# Altium PCB ESC PCB.PcbDoc
Units mil, origin at the board's own origin, x right, y up, seen from the top; angles counter-clockwise.
Board outline 5629.92 x 3964.57 mil, 2 copper layers (Top Layer, Bottom Layer), stack 65.792 mil thick; 99 components, 73 nets, 311 pads, 137 vias.
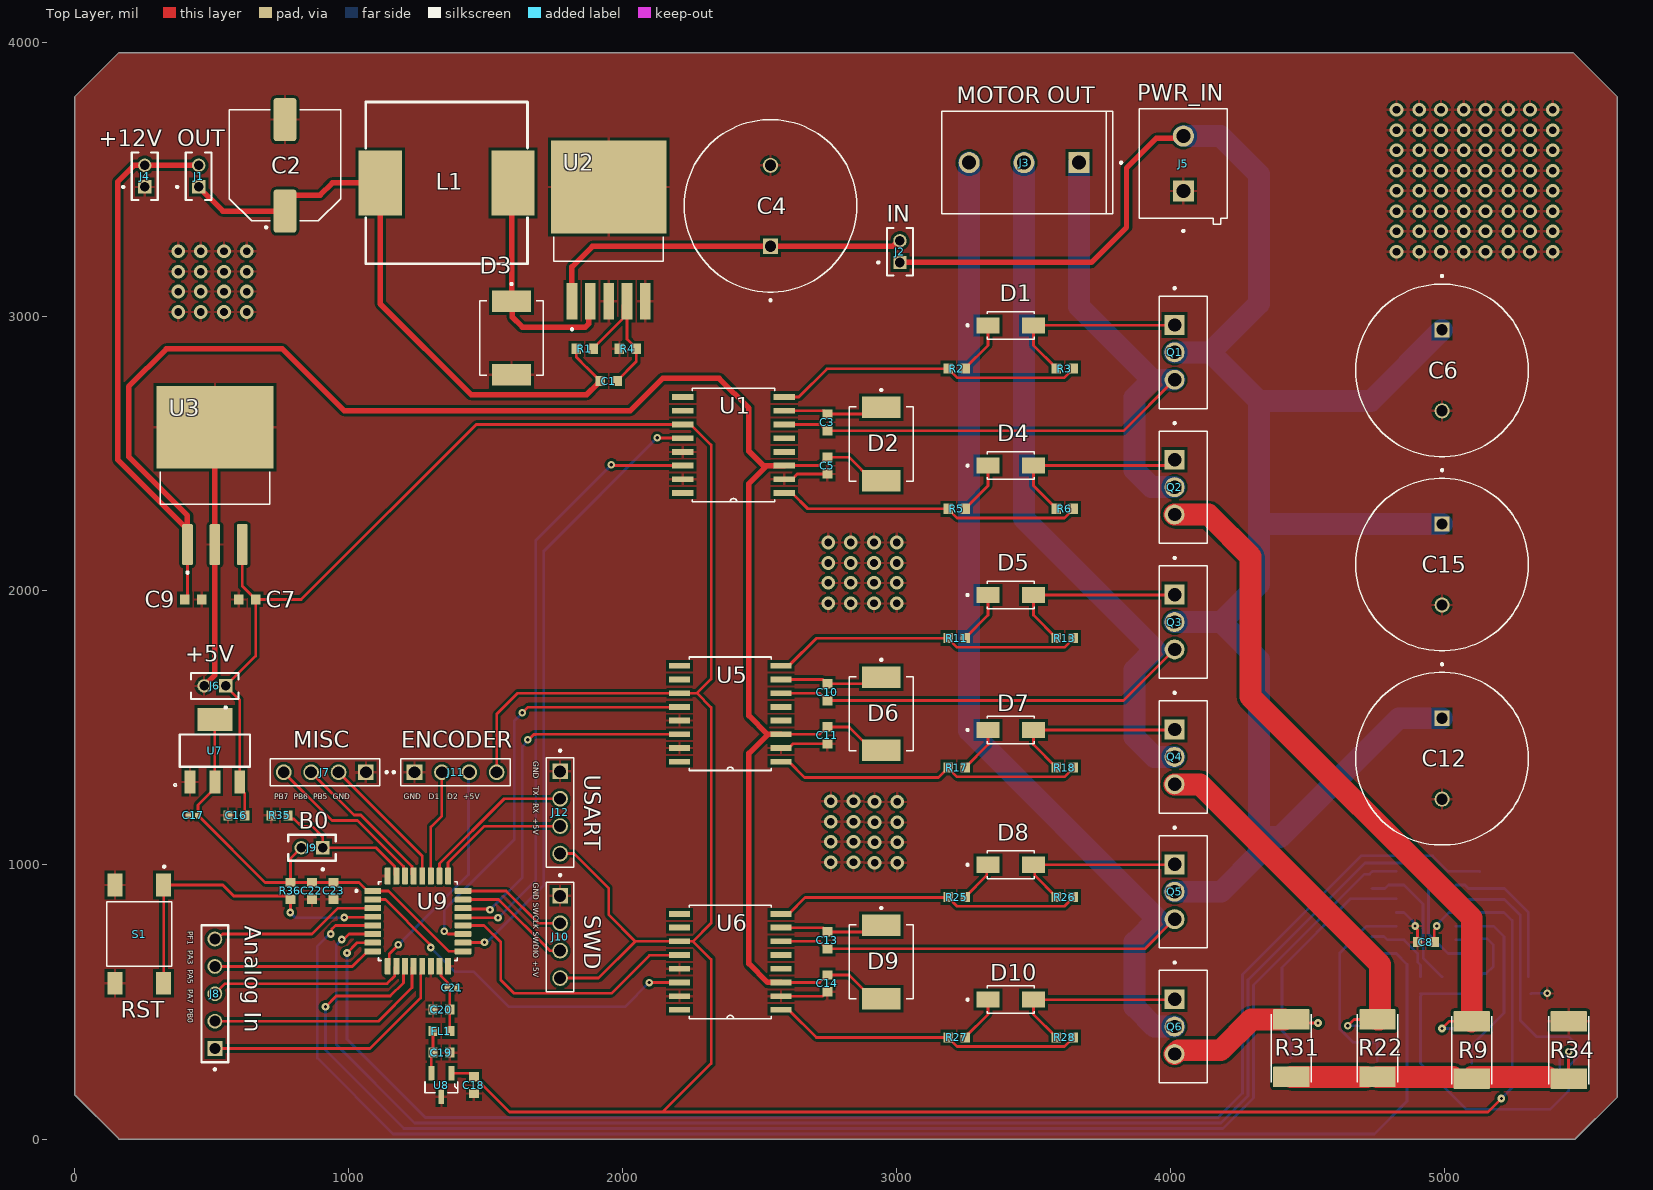
[diagram p0: Top Layer view]
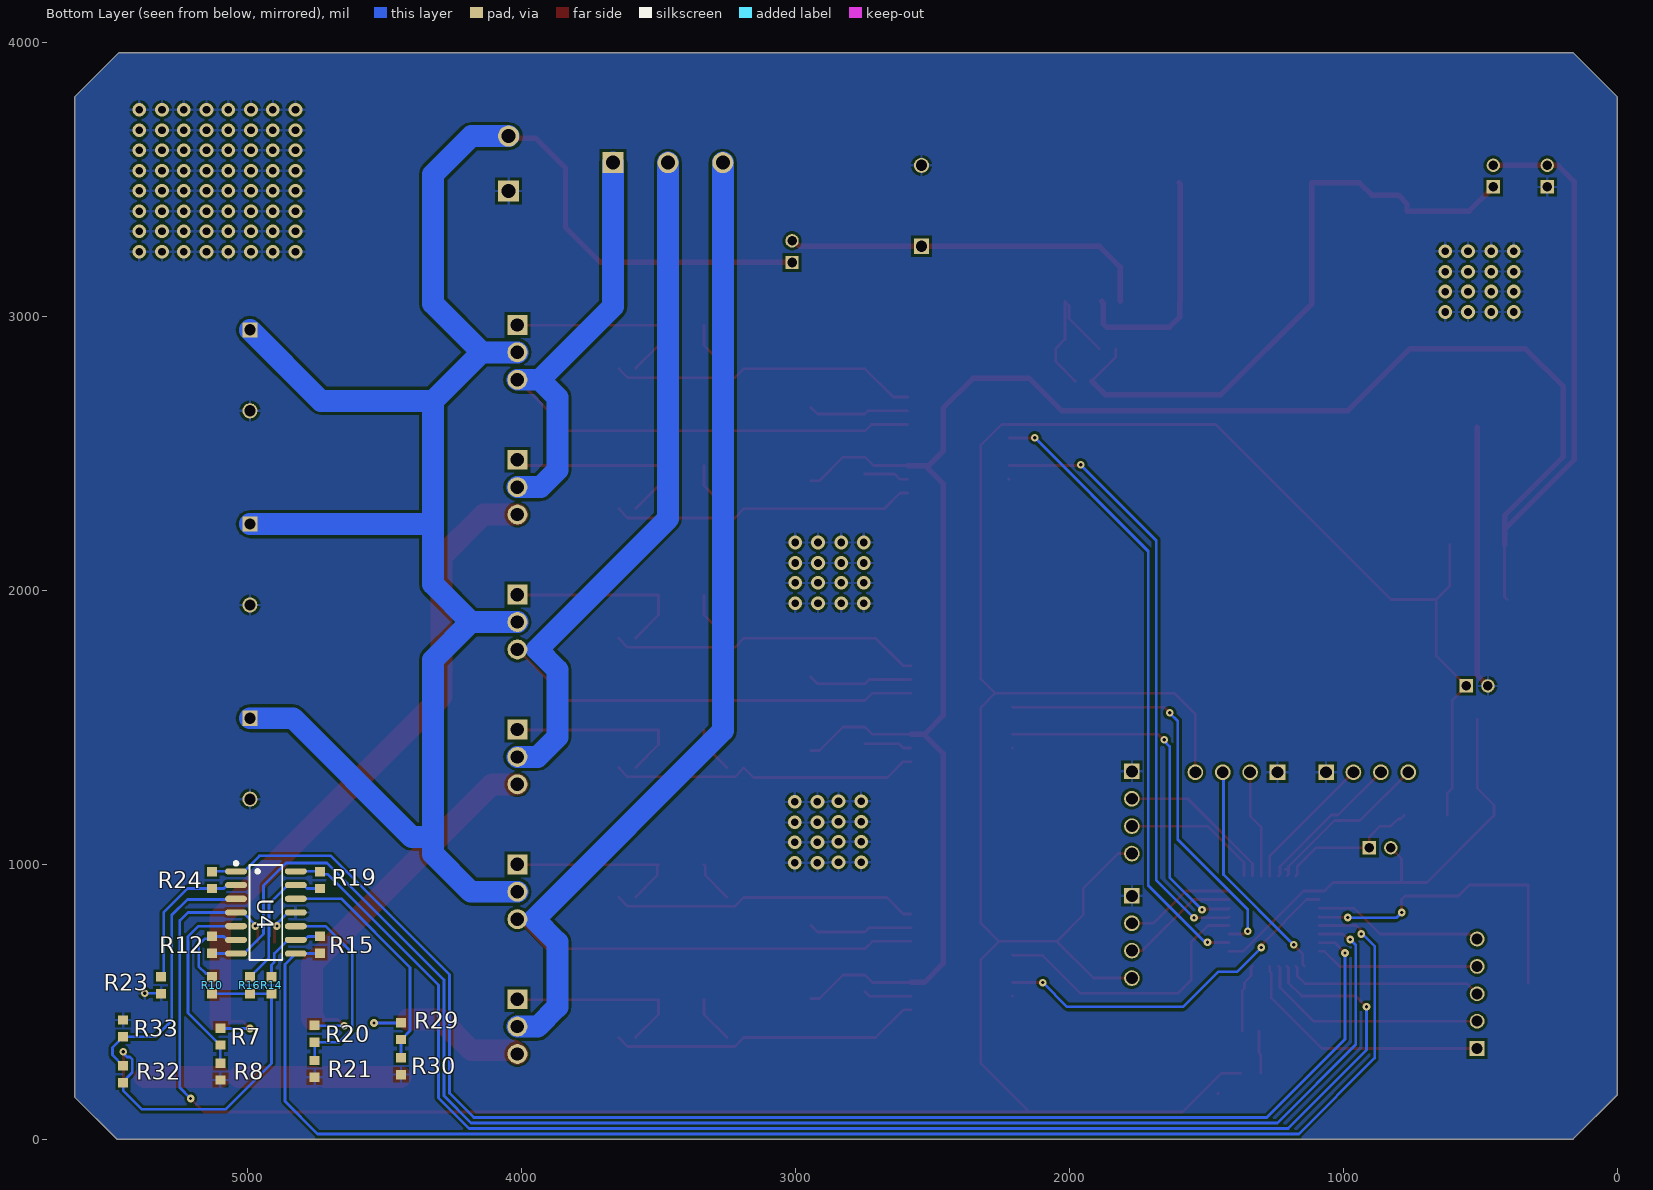
[diagram p1: Bottom Layer view, seen from below]

## Layer stack, top to bottom
Top Solder: solder mask 0.4, Solder Resist, Dk 3.5
Top Layer: signal copper 1.4
Dielectric 1: dielectric 62.9921, FR-4, Dk 4.8
Bottom Layer: signal copper 1.4
Bottom Solder: solder mask 0.4, Solder Resist, Dk 3.5

## Board outline
0,161.42 161.42,0 5476.38,0 5629.92,153.54 5629.92,3803.15 5468.5,3964.57 161.42,3964.57 0,3803.15

## Design rules (kind name [scope] priority, off if disabled: settings)
Clearance Clearance_1 [All] p1: gap=10 ignorepadtopadclearanceinfootprint=TRUE except(0: Arc-Hole Track-Hole SMDPad-Hole THPad-Hole Via-Hole Fill-Hole Poly-Hole Region-Hole Text-Hole; 5: Arc-Arc Arc-Track Track-Track SMDPad-SMDPad; 8: Arc-SMDPad Track-SMDPad)
PolygonConnect [All] p1: connectstyle=Relief reliefconductorwidth=10 reliefentries=4 polygonreliefangle="90 Angle" airgapwidth=10
RoutingVias [All] p1: holewidth=28 width=50 viastyle="Through Hole" minholewidth=28 minwidth=50 maxholewidth=28 maxwidth=50
SolderMaskExpansion [All] p1: expansion=4 istentingtop=FALSE
Width Width_1 [All] p1: maxlimit=100 minlimit=10 preferedwidth=10 minimp=50.000000 maximp=50.000000 favimp=50.000000
30 further rules are at their usual default settings.

## Classes and differential pairs
component class "Power Schematic": C1 C2 C3 C4 C5 C6 C7 C8 C9 C10 C11 C12 C13 C14 C15 D1 D2 D3 D4 D5 D6 D7 D8 D9 D10 J1 J2 J3 J4 J5 L1 Q1 Q2 Q3 Q4 Q5 Q6 R1 R2 R3 R4 R5 R6 R7 R8 R9 R10 R11 R12 R13 R14 R15 R16 R17 R18 R19 R20 R21 R22 R23 R24 R25 R26 R27 R28 R29 R30 R31 R32 R33 R34 U1 U2 U3 U4 U5 U6
component class "Control Schematic": C16 C17 C18 C19 C20 C21 C22 C23 FL1 J6 J7 J8 J9 J10 J11 J12 R35 R36 S1 U7 U8 U9

## Components (designator, comment, footprint, x,y, rotation, side; value= is the part's Value field where it differs from the comment)
C1 "2.6nF" "0603 Footprint" 1948.82,2765.75 r0 top
C2 "220uF 50V" CAPAE1030X1080N_UWT1H221MNL1GS 767.72,3553.15 r90 top
C3 "1uF" "0603 Footprint" 2746.87,2614.96 r270 top
C4 "680uF" CAPPRD750W80D1600H2500 2539.37,3405.51 r90 top
C5 "1uF" "0603 Footprint" 2746.87,2457.48 r270 top
C6 "680uF" CAPPRD750W80D1600H2500 4990.16,2805.12 r270 top
C7 "100nF" "0603 Footprint" 629.92,1968.5 r180 top
C8 "100nF" "0603 Footprint" 4931.1,718.5 r0 top
C9 "330nF" "0603 Footprint" 433.07,1968.5 r0 top
C10 "1uF" "0603 Footprint" 2746.87,1630.71 r270 top
C11 "1uF" "0603 Footprint" 2746.87,1473.23 r270 top
C12 "680uF" CAPPRD750W80D1600H2500 4990.16,1387.8 r270 top
C13 "1uF" "0603 Footprint" 2746.87,725.2 r270 top
C14 "1uF" "0603 Footprint" 2746.87,567.72 r270 top
C15 "680uF" CAPPRD750W80D1600H2500 4990.16,2096.46 r270 top
C16 "100nF" "0603 Footprint" 590.55,1181.1 r0 top
C17 "10uF" "0402 Footprint" 433.07,1181.1 r180 top
C18 "0.47uF" "0603 Footprint" 1456.69,196.85 r90 top
C19 "1uF" "0603 Footprint" 1338.58,314.96 r0 top
C20 "1uF" "0603 Footprint" 1338.58,472.44 r180 top
C21 "10nF" "0402 Footprint" 1377.95,551.18 r180 top
C22 "100nF" "0603 Footprint" 866.14,905.51 r90 top
C23 "100nF" "0603 Footprint" 944.88,905.51 r90 top
D1 "SS14" DIOM4325X250N 3416.16,2969.29 r0 top
D2 "SS310" DIO_SS310 2943.72,2536.22 r270 top
D3 "SS310" DIO_SS310 1594.49,2923.23 r270 top
D4 "SS14" DIOM4325X250N 3416.16,2457.48 r0 top
D5 "SS14" DIOM4325X250N 3416.16,1985.04 r0 top
D6 "SS310" DIO_SS310 2943.72,1551.97 r270 top
D7 "SS14" DIOM4325X250N 3416.16,1492.91 r0 top
D8 "SS14" DIOM4325X250N 3416.16,1000.79 r0 top
D9 "SS310" DIO_SS310 2943.72,646.46 r270 top
D10 "SS14" DIOM4325X250N 3416.16,508.66 r0 top
FL1 "BLM18PG121SN1D" "0603 Footprint" 1338.58,393.7 r0 top
J1 "Buck Out" SAMTEC_MTMM-101-10-G-D-135 452.76,3513.78 r0 top
J2 "Buck In" SAMTEC_MTMM-101-10-G-D-135 3011.81,3238.19 r0 top
J3 "Motor Output" PHOENIX_MKDSN2,5/3-5.08 3464.57,3562.99 r180 top
J4 "12V Header" SAMTEC_MTMM-101-10-G-D-135 255.91,3513.78 r0 top
J5 "Main Power" PHOENIX_1729128 4046.08,3559.84 r90 top
J6 "5V Out" SAMTEC_MTMM-101-10-G-D-135 511.81,1653.54 r90 top
J7 "MISC" WURTH_61300411121 912.99,1338.58 r180 top
J8 "Analog In" SAMTEC_TLW-105-06-T-S 511.81,329.92 r270 top
J9 "Boot0" SAMTEC_MTMM-101-10-G-D-135 866.14,1062.99 r90 top
J10 "SWD" WURTH_61300411121 1771.65,737.4 r270 top
J11 "Encoder" WURTH_61300411121 1390.16,1338.58 r0 top
J12 "USART" WURTH_61300411121 1771.65,1191.73 r270 top
L1 "150uH" "SMD 15x15" 1358.27,3474.41 r180 top
Q1 "IRF540NPBF" TO254P1054X469X1930-3 4046.08,2870.87 r270 top
Q2 "IRF540NPBF" TO254P1054X469X1930-3 4046.08,2378.74 r270 top
Q3 "IRF540NPBF" TO254P1054X469X1930-3 4046.08,1886.61 r270 top
Q4 "IRF540NPBF" TO254P1054X469X1930-3 4046.08,1394.49 r270 top
Q5 "IRF540NPBF" TO254P1054X469X1930-3 4046.08,902.36 r270 top
Q6 "IRF540NPBF" TO254P1054X469X1930-3 4046.08,410.24 r270 top
R1 "12K" "0603 Footprint" 1861.42,2883.86 r180 top
R2 "40R" "0603 Footprint" 3219.31,2811.81 r0 top
R3 "200R" "0603 Footprint" 3613.01,2811.81 r180 top
R4 "1K" "0603 Footprint" 2018.9,2883.86 r0 top
R5 "40R" "0603 Footprint" 3219.31,2300 r0 top
R6 "200R" "0603 Footprint" 3613.01,2300 r180 top
R7 "1K" "0603 Footprint" 5098.43,374.02 r90 bottom
R8 "25K" "0603 Footprint" 5098.43,246.06 r90 bottom
R9 "2mR" "2512 Footprint" 5098.43,324.8 r90 top
R10 "1K" "0603 Footprint" 5127.95,561.02 r90 bottom
R11 "40R" "0603 Footprint" 3219.31,1827.56 r0 top
R12 "25K" "0603 Footprint" 5127.95,708.66 r270 bottom
R13 "200R" "0603 Footprint" 3613.01,1827.56 r180 top
R14 "1K" "0603 Footprint" 4911.42,561.02 r90 bottom
R15 "25K" "0603 Footprint" 4734.25,708.66 r270 bottom
R16 "1K" "0603 Footprint" 4990.16,561.02 r90 bottom
R17 "40R" "0603 Footprint" 3219.31,1355.12 r0 top
R18 "200R" "0603 Footprint" 3613.01,1355.12 r180 top
R19 "25K" "0603 Footprint" 4734.25,944.88 r90 bottom
R20 "1K" "0603 Footprint" 4753.94,383.86 r90 bottom
R21 "25K" "0603 Footprint" 4753.94,255.91 r90 bottom
R22 "2mR" "2512 Footprint" 4754.74,331.5 r90 top
R23 "1K" "0603 Footprint" 5314.96,561.02 r90 bottom
R24 "25K" "0603 Footprint" 5127.95,944.88 r90 bottom
R25 "40R" "0603 Footprint" 3219.31,882.68 r0 top
R26 "200R" "0603 Footprint" 3613.01,882.68 r180 top
R27 "40R" "0603 Footprint" 3219.31,370.87 r0 top
R28 "200R" "0603 Footprint" 3613.01,370.87 r180 top
R29 "1K" "0603 Footprint" 4438.98,393.7 r90 bottom
R30 "25K" "0603 Footprint" 4438.98,265.75 r90 bottom
R31 "2mR" "2512 Footprint" 4439.78,331.5 r90 top
R32 "1K" "0603 Footprint" 5452.76,236.22 r270 bottom
R33 "25K" "0603 Footprint" 5452.76,403.54 r270 bottom
R34 "2mR" "2512 Footprint" 5452.76,324.8 r270 top
R35 "1K" "0603 Footprint" 748.03,1181.1 r0 top
R36 "1K" "0603 Footprint" 787.4,905.51 r90 top
S1 "Btn" SW_3-1437565-0 236.22,748.03 r270 top
U1 "IR2113S" IR2113S 2404.39,2532.48 r180 top
U2 "LM2596SX-ADJ" VREG_LM2596SX-ADJ 1948.82,3474.41 r90 top
U3 "LM7805S/NOPB" TO254P1524X483-4N 511.81,2421.26 r90 top
U4 "TSV994" TSV994IDT 4815.98,2001.79 r270 bottom
U5 "IR2113S" IR2113S 2392.54,1551.97 r180 top
U6 "IR2113S" IR2113S 2392.54,646.46 r180 top
U7 "LD1117S33TR" SOT230P700X180-4N 511.81,1417.32 r90 top
U8 "REF3033AIDBZR" SOT95P237X112-3N 1338.58,196.85 r270 top
U9 "STM32G431KBT6" QFP80P900X900X160-32N 1252.76,795.28 r0 top

## Footprints (in the part's own frame and the unit in brackets; to place one, negate y for a bottom-side part, rotate by r counter-clockwise, add the part's x,y. Pads: shape width x height; smd on the part's side, far side on the other; paste and mask are expansions set on the pad)
"0402 Footprint" [mm]
  rrect50% 0.54x0.6 smd: 1(-0.43,0) 2(0.43,0)
"0603 Footprint" [mm]
  rect 0.87x0.93 smd: 1(-0.78,0) 2(0.78,0)
"2512 Footprint" [mm]
  rrect7% 1.9x3.37 smd: 1(-2.66,0) 2(2.66,0)
  silkscreen extent -3.15,-1.87 3.15,1.87
CAPAE1030X1080N_UWT1H221MNL1GS [mm]
  rrect25% 3.99x2.12 smd: 1(-4.24,0) 2(4.24,0)
  silkscreen extent -5.85,-5.15 5.15,5.15
CAPPRD750W80D1600H2500 [mm]
  rect 1.4x1.4 hole 1.05: 1(-3.75,0)
  round 1.4 hole 1.05: 2(3.75,0)
  silkscreen extent -8.85,-8 8,8, body extent -8,-8 8,8, height 25
DIO_SS310 [mm]
  rect 2x3.6 smd: A(3.4,0) C(-3.4,0)
  silkscreen extent -5.1,-2.95 3.44,2.95, body extent -3.98,-2.95 3.98,2.95, height 2.65
DIOM4325X250N [mm]
  rect 2.12x1.5 smd: A(2.115,0) C(-2.115,0)
  silkscreen extent -4.1,-1.28 2.16,1.28
IR2113S [mil]
  rect 78x21 smd: 1(-185,175) 2(-185,125) 3(-185,75) 4(-185,25) 5(-185,-25) 6(-185,-75) 7(-185,-125) 8(-185,-175) 9(185,-175) 10(185,-125) 11(185,-75) 12(185,-25) 13(185,25) 14(185,75) 15(185,125) 16(185,175)
  silkscreen extent -150,-207 150,207
PHOENIX_1729128 [mm]
  rect 1.95x1.95 / inner round 1.95 / far side rect 1.95x1.95 hole 1.3: 1(-2.54,0)
  round 1.95 hole 1.3: 2(2.54,0)
  silkscreen extent -6.35,-4.05 5.08,4.1
PHOENIX_MKDSN2,5/3-5.08 [mm]
  rect 1.95x1.95 / inner round 1.95 / far side rect 1.95x1.95 hole 1.3: 1(-5.08,0)
  round 1.95 hole 1.3: 2(0,0) 3(5.08,0)
  silkscreen extent -9.1,-4.75 7.62,4.75, body extent -8.19,-4.75 7.62,4.75, height 15.15
QFP80P900X900X160-32N [mm]
  rrect25% 1.56x0.55 smd: 1(-4.18,2.8) 2(-4.18,2) 3(-4.18,1.2) 4(-4.18,0.4) 5(-4.18,-0.4) 6(-4.18,-1.2) 7(-4.18,-2) 8(-4.18,-2.8) 17(4.18,-2.8) 18(4.18,-2) 19(4.18,-1.2) 20(4.18,-0.4) 21(4.18,0.4) 22(4.18,1.2) 23(4.18,2) 24(4.18,2.8)
  rrect25% 0.55x1.56 smd: 9(-2.8,-4.18) 10(-2,-4.18) 11(-1.2,-4.18) 12(-0.4,-4.18) 13(0.4,-4.18) 14(1.2,-4.18) 15(2,-4.18) 16(2.8,-4.18) 25(2.8,4.18) 26(2,4.18) 27(1.2,4.18) 28(0.4,4.18) 29(-0.4,4.18) 30(-1.2,4.18) 31(-2,4.18) 32(-2.8,4.18)
  silkscreen extent -5.8,-3.65 3.65,3.65
SAMTEC_MTMM-101-10-G-D-135 [mm]
  rect 1.24x1.24 hole 0.89: 01(0,-1)
  round 1.24 hole 0.89: 02(0,1)
  silkscreen extent -2.1,-2.2 1.2,2.2
SAMTEC_TLW-105-06-T-S [mm]
  rect 1.37x1.37 hole 1.02: 01(0,0)
  round 1.37 hole 1.02: 02(-2.54,0) 03(-5.08,0) 04(-7.62,0) 05(-10.16,0)
  silkscreen extent -11.43,-1.24 2.02,1.24
"SMD 15x15" [mm]
  rect 4x6 smd paste+0 mask+0.051: 1(-6.128,-0.374) 2(6.172,-0.374)
  silkscreen extent -7.48,-7.87 7.52,7.13
SOT95P237X112-3N [mil]
  rect 52x22 smd: 1(-43,37) 2(-43,-37)
  rect 52x20 smd: 3(43,0)
  silkscreen extent -11,-60 28,60
SOT230P700X180-4N [mm]
  rect 2.15x1 smd: 1(-2.9,2.3) 2(-2.9,0) 3(-2.9,-2.3)
  rect 2.15x3.25 smd: 4(2.9,0)
  silkscreen extent -3.3,-3.25 1.5,3.81, body extent -3.25,-3.5 3.25,3.5, height 1.8
SW_3-1437565-0 [mm]
  rect 2.1x1.4 smd: 1(-4.55,2.25) 2(4.55,2.25) 3(-4.55,-2.25) 4(4.55,-2.25)
  silkscreen extent -6.35,-3 3,3
TO254P1054X469X1930-3 [mm]
  rect 1.845x1.845 / inner round 1.845 / far side rect 1.845x1.845 hole 1.23: 1(-2.54,-0.81)
  round 1.845 hole 1.23: 2(0,-0.81) 3(2.54,-0.81)
  silkscreen extent -6.04,-2.22 5.21,2.22, body extent -5.21,-2.22 5.21,2.22, height 19.3
TO254P1524X483-4N [mm]
  rrect25% 3.79x0.99 smd: 1(-6.4,2.54) 2(-6.4,0) 3(-6.4,-2.54)
  rect 7.62x10.84 smd paste-6: 4(4.48,0)
  silkscreen extent -9.1,-5.08 0.35,5.08, body extent -7.18,-5.08 7.18,5.08, height 4.65
TSV994IDT [mil]
  oval 22.6x80.24 smd paste+0 mask+2: 1(1025.02,-224.88) 2(1075.02,-224.88) 3(1125.02,-224.88) 4(1175.02,-224.88) 5(1225.02,-224.88) 6(1275.02,-224.88) 7(1325.02,-224.88) 8(1325.02,-6.85) 9(1275.02,-6.85) 10(1225.02,-6.85) 11(1175.02,-6.85) 12(1125.02,-6.85) 13(1075.02,-6.85) 14(1025.02,-6.85)
  silkscreen extent 990,-231 1348,-56
VREG_LM2596SX-ADJ [mm]
  rect 3.4x1 smd paste-0.05 mask+0.07: 1(-10.6,3.4) 2(-10.6,1.7) 3(-10.6,0) 4(-10.6,-1.7) 5(-10.6,-3.4)
  rect 8.6x10.7 smd paste-0.05 mask+0.07: 6(0,0)
  silkscreen extent -13.3,-5.08 -4.62,5.08, body extent -7.18,-5.08 7.18,5.08, height 4.65
WURTH_61300411121 [mm]
  rect 1.45x1.45 / inner round 1.45 / far side rect 1.45x1.45 hole 1.1 mask+0.05: 01(-3.81,0)
  round 1.45 hole 1.1 mask+0.05: 02(-1.27,0) 03(1.27,0) 04(3.81,0)
  silkscreen extent -5.83,-1.27 5.08,1.27

## Part data
C1: "2.6nF 0603", Package="0603 Samsung", Arrow_Electronics-Purchase-URL=https://snapeda.com/shop?store=Arrow+Electronics&id=3597973, Arrow_Europe-Purchase-URL=https://snapeda.com/shop?store=Arrow+Europe&id=3597973, Digi-Key_Part_Number=1276-1102-1-ND, DigiKey-Purchase-URL=https://snapeda.com/shop?store=DigiKey&id=3597973, MF="Samsung Electro-Mechanics", MP=CL10A105KA8NNNC, SnapEDA_Link=https://www.snapeda.com/parts/CL10A105KA8NNNC/Samsung%20Electro-Mechanics/view-part/3597973/?ref=snap
C2: "220ÂµF 50V Aluminum Electrolytic Capacitors Radial, Can - SMD 1000 Hrs @ 105Â°C", Package="Radial Nichicon", Availability=Unavailable, MF=Nichicon, MP=UWT1H221MNL1GS, Price=None, SnapEDA_Link=https://www.snapeda.com/parts/UWT1H221MNL1GS/Nichicon/view-part/566503/?ref=snap
C3 C5 C10 C11 C13 C14 C19 C20: "1ÂµF Â±10% 25V Ceramic Capacitor X5R 0603 (1608 Metric)", Package="0603 Samsung", Arrow_Electronics-Purchase-URL=https://snapeda.com/shop?store=Arrow+Electronics&id=3597973, Arrow_Europe-Purchase-URL=https://snapeda.com/shop?store=Arrow+Europe&id=3597973, Digi-Key_Part_Number=1276-1102-1-ND, DigiKey-Purchase-URL=https://snapeda.com/shop?store=DigiKey&id=3597973, MF="Samsung Electro-Mechanics", MP=CL10A105KA8NNNC, SnapEDA_Link=https://www.snapeda.com/parts/CL10A105KA8NNNC/Samsung%20Electro-Mechanics/view-part/3597973/?ref=snap
C4 C6 C12 C15: "680uF 100V 64mΩ@100kHz ±20% 1.41A@100kHz. Aluminum Electrolytic", Package="Radial Illinois Capacitor", Availability=Warning, MF="Illinois Capacitor", Mouser-Purchase-URL=https://snapeda.com/shop?store=Mouser&id=2347563, MP=478CKS010M, Price=None, SnapEDA_Link=https://www.snapeda.com/parts/478CKS010M/Illinois%20Capacitor/view-part/2347563/?ref=snap
C7 C8 C16 C22 C23: "0.1ÂµF Â±10% 50V Ceramic Capacitor X7R 0603 _1608 Metric_", Package="0603 Samsung", Availability=Unavailable, MF="Samsung Electro-Mechanics", MP=CL10B104KB8NNNC, Price=None, SnapEDA_Link=https://www.snapeda.com/parts/CL10B104KB8NNNC/Samsung%20Electro-Mechanics/view-part/3598309/?ref=snap
C9: "330nF 0603", Package="0603 Samsung", Availability=Unavailable, MF="Samsung Electro-Mechanics", MP=CL10B104KB8NNNC, Price=None, SnapEDA_Link=https://www.snapeda.com/parts/CL10B104KB8NNNC/Samsung%20Electro-Mechanics/view-part/3598309/?ref=snap
C17: "10ÂµF Â±20% 6.3V Ceramic Capacitor X5R 0402 (1005 Metric)", Package="0402 Samsung", Arrow_Electronics-Purchase-URL=https://snapeda.com/shop?store=Arrow+Electronics&id=3597832, Availability=Good, DigiKey-Purchase-URL=https://snapeda.com/shop?store=DigiKey&id=3597832, MF=Samsung, MP=CL05A106MQ5NUNC, Price=None, SnapEDA_Link=https://www.snapeda.com/parts/CL05A106MQ5NUNC/Samsung/view-part/3597832/?ref=snap
C18: "0.47ÂµF Â±10% 25V Ceramic Capacitor X7R 0603 (1608 Metric)", Package="0603 Samsung", Availability=Warning, Check_prices=https://www.snapeda.com/parts/CL10B474KA8NFNC/Samsung%20Electro-Mechanics/view-part/3599462/?ref=eda, MF="Samsung Electro-Mechanics", MP=CL10B474KA8NFNC, Price=None, Purchase-URL=https://pricing.snapeda.com/search/part/CL10B474KA8NFNC/?ref=eda, SnapEDA_Link=https://www.snapeda.com/parts/CL10B474KA8NFNC/Samsung%20Electro-Mechanics/view-part/3599462/?ref=snap
C21: "25V 10nF X7R ±10% 0402 Multilayer Ceramic Capacitors MLCC - SMD/SMT ROHS", Package="0603 Samsung", Availability=Warning, Check_prices=https://www.snapeda.com/parts/CL10B474KA8NFNC/Samsung%20Electro-Mechanics/view-part/3599462/?ref=eda, MF="Samsung Electro-Mechanics", MP=CL10B474KA8NFNC, Price=None, Purchase-URL=https://pricing.snapeda.com/search/part/CL10B474KA8NFNC/?ref=eda, SnapEDA_Link=https://www.snapeda.com/parts/CL10B474KA8NFNC/Samsung%20Electro-Mechanics/view-part/3599462/?ref=snap
D1 D4 D5 D7 D8 D10: Package=None, Availability=Unavailable, MP=SS14, Price=None
D2 D3 D6 D9: "3A, 100V, Schottky Rectifier", Package="DO-214AB-2 Taiwan Semiconductor", Check_prices=https://www.snapeda.com/parts/SS310/Taiwan+Semiconductor/view-part/?ref=eda, MF="Taiwan Semiconductor", MP=SS310, SnapEDA_Link=https://www.snapeda.com/parts/SS310/Taiwan+Semiconductor/view-part/?ref=snap
FL1: "120 Ohms @ 100MHz 1 Power Line Ferrite Bead 0603 _1608 Metric_ 2A 50mOhm", Package="1608 Murata", Digi-Key_Part_Number=490-1037-1-ND, Digi-Key_Purchase_URL=https://www.digikey.com/product-detail/en/murata-electronics/BLM18PG121SN1D/490-1037-1-ND/584485?utm_source=snapeda&utm_medium=aggregator&utm_campaign=symbol, MF=Murata, MP=BLM18PG121SN1D, SnapEDA_Link=https://www.snapeda.com/parts/BLM18PG121SN1D/Murata/view-part/12271/?ref=snap
J1 J2 J4 J6 J9: library part "2 Pin Header", "Connector Header Through Hole 2 position", Package=None, Availability="In Stock", Check_prices=https://www.snapeda.com/parts/MTMM-101-10-G-D-135/Samtec/view-part/?ref=eda, MF=Samtec, MP=MTMM-101-10-G-D-135, Price=None, Purchase-URL=https://pricing.snapeda.com/search/part/MTMM-101-10-G-D-135/?ref=eda, SnapEDA_Link=https://www.snapeda.com/parts/MTMM-101-10-G-D-135/Samtec/view-part/?ref=snap
J3: library part "3 Pin Screw Header", "HEADER, PCB, SCREW, 5.08MM, 3WAY; Connector Type: PCB; Series: MKDSN 2, 5; Connector Mounting: PCB; Pitch Spacing: 5....", Package=None, Availability="Not in stock", Check_prices=https://www.snapeda.com/parts/MKDSN2,5/3-5.08/Phoenix+Contact/view-part/?ref=eda, MF="Phoenix Contact", MP=MKDSN2,5/3-5.08, Price=None, SnapEDA_Link=https://www.snapeda.com/parts/MKDSN2,5/3-5.08/Phoenix+Contact/view-part/?ref=snap
J5: library part "2 Pin Screw Header", Package=None, Availability=Unavailable, MF="{'manufacturer': u'Phoenix Contact'}", MP=1729128, Price=None
J7 J10 J11 J12: library part "4 Pin Header", "Connector Header Through Hole 4 position 0.100 (2.54mm)", Package=None, Check_prices=https://www.snapeda.com/parts/61300411121/Wurth+Electronics+Inc./view-part/?ref=eda, MF="Wurth Electronics", MP=61300411121, SnapEDA_Link=https://www.snapeda.com/parts/61300411121/Wurth+Electronics+Inc./view-part/?ref=snap
J8: library part "5 Pin Header", Package=None, Availability=Unavailable, MP=TLW-105-06-T-S, Price=None
L1: "150uH Power Inductor / SMD 15mm x 15mm"
Q1 Q2 Q3 Q4 Q5 Q6: "RoHS Compliant", Package="TO-220 Infineon", Availability="In Stock", Check_prices=https://www.snapeda.com/parts/IRF540NPBF/Infineon+Technologies/view-part/?ref=eda, MF=Infineon, MP=IRF540NPBF, Price=None, Purchase-URL=https://pricing.snapeda.com/search/part/IRF540NPBF/?ref=eda, SnapEDA_Link=https://www.snapeda.com/parts/IRF540NPBF/Infineon+Technologies/view-part/?ref=snap
R1: "12K 0603", Package="0603 Yageo", Check_prices=https://www.snapeda.com/parts/RC0603FR-071KL/Yageo/view-part/?ref=eda, MF=Yageo, MP=RC0603FR-071KL, SnapEDA_Link=https://www.snapeda.com/parts/RC0603FR-071KL/Yageo/view-part/?ref=snap
R2 R5 R11 R17 R25 R27: "40R 0603", Package="0603 Yageo", Check_prices=https://www.snapeda.com/parts/RC0603FR-071KL/Yageo/view-part/?ref=eda, MF=Yageo, MP=RC0603FR-071KL, SnapEDA_Link=https://www.snapeda.com/parts/RC0603FR-071KL/Yageo/view-part/?ref=snap
R3 R6 R13 R18 R26 R28: "200R 0603", Package="0603 Yageo", Check_prices=https://www.snapeda.com/parts/RC0603FR-071KL/Yageo/view-part/?ref=eda, MF=Yageo, MP=RC0603FR-071KL, SnapEDA_Link=https://www.snapeda.com/parts/RC0603FR-071KL/Yageo/view-part/?ref=snap
R4 R7 R10 R14 R16 R20 R23 R29 R32 R35 R36: "1 kOhms Â±1% 0.1W, 1/10W Chip Resistor 0603 (1608 Metric) Moisture Resistant Thick Film", Package="0603 Yageo", Check_prices=https://www.snapeda.com/parts/RC0603FR-071KL/Yageo/view-part/?ref=eda, MF=Yageo, MP=RC0603FR-071KL, SnapEDA_Link=https://www.snapeda.com/parts/RC0603FR-071KL/Yageo/view-part/?ref=snap
R8 R12 R15 R19 R21 R24 R30 R33: "25K Ohm 0603", Package="0603 Yageo", Check_prices=https://www.snapeda.com/parts/RC0603FR-071KL/Yageo/view-part/?ref=eda, MF=Yageo, MP=RC0603FR-071KL, SnapEDA_Link=https://www.snapeda.com/parts/RC0603FR-071KL/Yageo/view-part/?ref=snap
R9 R22 R31 R34: "RLP73K 3A R16 5% 2K RL", Package=None, Availability=Unavailable, MP=3-2176058-0, Price=None
S1: "Switch Tactile OFF (ON) SPST Round Button Gull Wing 0.05A 24VDC 1VA 9.18N SMD T/R / 3-1437565-0", Package="SMD-6 Omron Electronics", Availability=Good, MF="TE Connectivity", MP=3-1437565-0, Price=None, Purchase-URL=https://pricing.snapeda.com/search/part/3-1437565-0/?ref=eda, SnapEDA_Link=https://www.snapeda.com/parts/3-1437565-0/TE%20Connectivity/view-part/294084/?ref=snap
U1 U5 U6: "Half-Bridge Gate Driver IC Non-Inverting 16-SOIC", Package="SOIC-16 Infineon", Availability=Unavailable, MF="Infineon Technologies", MP=IR2113S, Price=None, SnapEDA_Link=https://www.snapeda.com/parts/IR2113S/Infineon%20Technologies/view-part/577803/?ref=snap
U2: "SIMPLE SWITCHER&reg; 4.5V to 40V, 3A Low Component Count Step-Down Regulator 5-DDPAK/TO-263 -40 to 125", Package="TO-263-5 Texas Instruments", Availability="In Stock", Check_prices=https://www.snapeda.com/parts/LM2596SX-ADJ/Texas+Instruments/view-part/?ref=eda, MF="Texas Instruments", MP=LM2596SX-ADJ, Price=None, Purchase-URL=https://pricing.snapeda.com/search/part/LM2596SX-ADJ/?ref=eda, SnapEDA_Link=https://www.snapeda.com/parts/LM2596SX-ADJ/Texas+Instruments/view-part/?ref=snap
U3: "1.5-A, 30-V, linear voltage regulator", Package="TO-263-3 Texas Instruments", Availability="In Stock", Check_prices=https://www.snapeda.com/parts/LM7805S/NOPB/Texas+Instruments/view-part/?ref=eda, MF="Texas Instruments", MP=LM7805S/NOPB, Price=None, Purchase-URL=https://pricing.snapeda.com/search/part/LM7805S/NOPB/?ref=eda, SnapEDA_Link=https://www.snapeda.com/parts/LM7805S/NOPB/Texas+Instruments/view-part/?ref=snap
U7: "Linear Voltage Regulator IC Positive Fixed 1 Output 800mA SOT-223", Package="TO-261-4 STMicroelectronics", Availability="In Stock", Check_prices=https://www.snapeda.com/parts/LD1117S33TR/STMicroelectronics/view-part/?ref=eda, MF=STMicroelectronics, MP=LD1117S33TR, Price=None, Purchase-URL=https://pricing.snapeda.com/search/part/LD1117S33TR/?ref=eda, SnapEDA_Link=https://www.snapeda.com/parts/LD1117S33TR/STMicroelectronics/view-part/?ref=snap
U8: "Series Voltage Reference IC Â±0.2% SOT-23-3", Package="SOT-23-3 Texas Instruments", Availability=Unavailable, MF="Texas Instruments", MP=REF3033AIDBZR, Price=None, SnapEDA_Link=https://www.snapeda.com/parts/REF3033AIDBZR/Texas%20Instruments/view-part/298602/?ref=snap
U9: "ARMÂ® CortexÂ®-M4F STM32G4 Microcontroller IC 32-Bit 170MHz 128KB _128K x 8_ FLASH 32-LQFP _7x7_", Package="LQFP-32 STMicroelectronics", Availability=Unavailable, MF=STMicroelectronics, MP=STM32G431KBT6, Price=None, SnapEDA_Link=https://www.snapeda.com/parts/STM32G431KBT6/STMicroelectronics/view-part/4422336/?ref=snap

## Via types
v1: diameter 50, hole 28, Top Layer to Bottom Layer, 112 vias
v2: diameter 28, hole 12, Top Layer to Bottom Layer, 25 vias

## Nets (pads, with @x,y where several pads share a name; then routed paths per layer and width w, separated by ;. In a path a pad name is that pad's centre, name@x,y a point inside that pad or via, vN(x,y) a via of type N, cw(c..) or ccw(c..) an arc to the next point about the centre after c; other vN are vias at no path point)
+3.3: C17.1 C22.2 C23.2 J9.02 R36.2 U7.2 U7.4 U9.1 U9.17 | length 1692.5
  Top Layer w10: U7.4 U7.2 511.81,1280.51 450,1218.7 C17.1 450,1180.09 455.61,1174.49 456.62,1174.49 694.88,936.22 R36.2 ; J9.02 787.4,1023.62 R36.2 ; U9.17 1365.83,685.04 1145.35,905.51 U9.1 1068.31,905.51 1037.6,936.22 C23.2 C22.2 R36.2
+5: C7.1 C8.2 C16.2 C18.2 J6.01 J10.04 J11.04 J12.04 U1.11 U3.3 U4.4 U5.11 U6.11 U7.3 U8.1 | length 12571.6
  Top Layer w10: U3.3 611.81,2018.5 660.63,1969.69 C7.1 ; C16.2 621.26,1261.61 602.36,1280.51 U7.3 602.36,1602.36 J6.01 660.63,1762.99 C7.1 ; U8.1 1412.4,239.85 1412.57,239.69 1444.57,239.69 C18.2 1457.87,227.56 1586.3,99.13 ; J11.04 1540.16,1550 1617.13,1626.97 U5.11 2270.67,1626.97 ; 1587.01,98.43 1905.22,98.43 ; J10.04 1911.94,587.4 2045.99,721.46 ; J12.04 1822.44,1041.73 1948.82,915.35 1948.82,818.63 2045.99,721.46 ; 1906.22,98.43 2145.67,98.43 ; C8.2 4961.81,764.03 4970.47,772.69 v2(4970.47,777.56) ; v2(5206.69,147.64) 5157.48,98.43 2145.67,98.43 ; C7.1 826.77,1968.5 1465.75,2607.48 U1.11 2247.89,2607.48 2322.83,2532.54 2322.83,1679.13 2270.67,1626.97 ; 2045.99,721.46 U6.11 2256.89,721.46 ; 2145.67,98.43 2322.83,275.59 2322.83,655.51 2256.89,721.46 ; 2256.89,721.46 2322.83,787.4 2322.83,1574.8 2270.67,1626.97
  Bottom Layer w10: v2(4970.47,777.56) 4970.47,781.79 5015.46,826.77 U4.4 5216.54,826.77 5246.06,797.24 5246.06,187.01 v2(5206.69,147.64)
+12: C5.1 C9.1 C11.1 C14.1 D2.A D6.A D9.A J1.02 J4.02 U1.3 U3.1 U5.3 U6.3 | length 8725.2
  Top Layer w10: C9.1 411.81,1977.95 U3.1 ; U1.3@2560.89,2453.79 2585.7,2453.79 U1.3 2714.98,2457.48 2745.69,2488.19 C5.1 2826.4,2488.19 2912.22,2402.36 D2.A ; U6.3 2718.72,571.46 2745.69,598.43 C14.1 2826.4,598.43 2912.22,512.6 D9.A ; U5.3 2718.72,1476.97 2745.69,1503.94 C11.1 2826.4,1503.94 2912.22,1418.11 D6.A
  Top Layer w20: U3.1 U3.1@411.81,2224.41 ; J1.02 J4.02 216.54,3553.15 157.48,3494.09 157.48,2478.74 U3.1@411.81,2224.41 ; 2519.68,2450.79 2460.63,2391.73 2460.63,1545.28 2528.94,1476.97 ; U6.3 2528.94,571.46 2460.63,639.76 2460.63,1407.48 2530.12,1476.97 U5.3 ; U1.3 2512.99,2457.48 2460.63,2509.84 2460.63,2667.32 2352.36,2775.59 2145.67,2775.59 2027.56,2657.48 984.25,2657.48 757.87,2883.86 334.65,2883.86 196.85,2746.06 196.85,2490.16 411.81,2275.2 U3.1@411.81,2224.41
GND: C2.2 C4.2 C5.2 C6.2 C7.2 C8.1 C9.2 C11.2 C12.2 C14.2 C15.2 C16.1 C17.2 C18.1 C19.2 C20.2 C21.1 C22.1 C23.1 D3.A J4.01 J5.1 J6.02 J7.01 J10.01 J11.01 J12.01 R4.1 R8.1 R21.1 R23.1 R30.1 R33.1 R34.1 R35.1 S1.3 S1.4 U1.2 U1.13 U1.15 U2.3 U2.5 U2.6 U3.2 U3.4 U4.11 U5.2 U5.13 U5.15 U6.2 U6.13 U6.15 U7.1 U8.3 U9.14 U9.16 U9.32 | length 1694.3
  Top Layer w10: C18.1 C18.1@1457.87,166.14 ; U6.15 U6.15@2207.64,521.56 ; U5.15 U5.15@2207.64,1427.07 ; U1.15 U1.15@2221.36,2409.45 ; U6.2 2730.14,521.46 2745.69,537.01 C14.2 ; U5.2 2606.04,1426.97 2621.59,1442.52 C11.2 ; U1.2 2617.89,2407.48 2637.18,2426.77 C5.2 ; v2(4891.73,777.56) 4891.73,772.69 4900.39,764.03 C8.1 ; v2@5364.17,531.5 v2(5374.02,531.5)
  Top Layer w20: J6.02 511.81,1692.91 U3.2 U3.4
  Bottom Layer w10: U4.11 4851.65,826.77 v2@4888.29,790.14 ; R23.1 5316.14,531.5 v2(5374.02,531.5)
  other v1: 2919.29,1007.87 3001.97,1007.87 2759.84,1009.84 2842.52,1009.84 2919.29,1082.68 3001.97,1082.68 2759.84,1084.65 2842.52,1084.65 2919.29,1155.51 3001.97,1155.51 2759.84,1157.48 2842.52,1157.48 2919.29,1230.31 3001.97,1230.31 2759.84,1232.28 2842.52,1232.28 2750,1954.72 2832.68,1954.72 2917.32,1954.72 3000,1954.72 2750,2029.53 2832.68,2029.53 2917.32,2029.53 3000,2029.53 2750,2102.36 2832.68,2102.36 2917.32,2102.36 3000,2102.36 2750,2177.17 2832.68,2177.17 2917.32,2177.17 3000,2177.17 377.95,3017.72 460.63,3017.72 545.28,3017.72 627.95,3017.72 377.95,3092.52 460.63,3092.52 545.28,3092.52 627.95,3092.52 377.95,3165.35 460.63,3165.35 545.28,3165.35 627.95,3165.35 4823.74,3238.19 4906.42,3238.19 4986.22,3238.19 5068.9,3238.19 5148.7,3238.19 5231.38,3238.19 5311.02,3238.19 5393.7,3238.19 377.95,3240.16 460.63,3240.16 545.28,3240.16 627.95,3240.16 4823.74,3312.99 4906.42,3312.99 4986.22,3312.99 5068.9,3312.99 5148.7,3312.99 5231.38,3312.99 5311.02,3312.99 5393.7,3312.99 4823.74,3385.83 4906.42,3385.83 4986.22,3385.83 5068.9,3385.83 5148.7,3385.83 5231.38,3385.83 5311.02,3385.83 5393.7,3385.83 4823.74,3460.63 4906.42,3460.63 4986.22,3460.63 5068.9,3460.63 5148.7,3460.63 5231.38,3460.63 5311.02,3460.63 5393.7,3460.63 4823.74,3533.46 4906.42,3533.46 4986.22,3533.46 5068.9,3533.46 5148.7,3533.46 5231.38,3533.46 5311.02,3533.46 5393.7,3533.46 4823.74,3608.27 4906.42,3608.27 4986.22,3608.27 5068.9,3608.27 5148.7,3608.27 5231.38,3608.27 5311.02,3608.27 5393.7,3608.27 4823.74,3681.1 4906.42,3681.1 4986.22,3681.1 5068.9,3681.1 5148.7,3681.1 5231.38,3681.1 5311.02,3681.1 5393.7,3681.1 4823.74,3755.91 4906.42,3755.91 4986.22,3755.91 5068.9,3755.91 5148.7,3755.91 5231.38,3755.91 5311.02,3755.91 5393.7,3755.91
NetC1_1: C1.1 C2.1 J1.01 L1.2 R1.2 | length 2314.4
  Top Layer w10: R1.2 1830.71,2853.15 1867.76,2816.1 1868.94,2816.1 1918.11,2766.93 C1.1
  Top Layer w20: J1.01 540.94,3386.22 C2.1 767.72,3412.63 799.42,3444.33 895.49,3444.33 940.29,3489.13 L1.2 1115.28,3048.11 1446.85,2716.54 1868.9,2716.54 1909.8,2757.44 1910.98,2757.44 1918.11,2764.57 C1.1
NetC1_2: C1.2 R1.1 R4.2 U2.4 | length 558.8
  Top Layer w10: R1.1 1892.13,2885.04 2001.06,2993.98 2001.06,3042.4 U2.4 2015.75,2918.9 2049.61,2885.04 R4.2 2049.61,2837.01 1979.53,2766.93 C1.2
NetC3_1: C3.1 D2.C U1.7 | length 369.3
  Top Layer w10: U1.7 2735.06,2657.48 C3.1 2919.31,2645.67 D2.C
NetC3_2: C3.2 J3.1 Q1.3 Q2.2 U1.6 | length 3024.9
  Top Layer w10: U1.6 2722.46,2607.48 2745.69,2584.25 C3.2 3827.56,2584.25 Q1.3
  Bottom Layer w80: J3.1 3664.57,3038.58 3932.28,2770.87 ; Q2.2 3930.31,2378.74 3868.11,2440.95 3868.11,2706.69 3932.28,2770.87 ; Q1.3 3932.28,2770.87
NetC4_1: C4.1 J2.02 U2.1 | length 1362
  Top Layer w20: U2.1 1814.96,3183.07 1889.76,3257.87 C4.1 2984.33,3257.87 3004.01,3277.56 J2.02
NetC10_1: C10.1 D6.C U5.7 | length 382.7
  Top Layer w10: U5.7 2730.14,1676.97 2745.69,1661.42 C10.1 2919.31,1661.42 D6.C
NetC10_2: C10.2 J3.2 Q3.3 Q4.2 U5.6 | length 4025.9
  Top Layer w10: U5.6 2718.72,1626.97 2745.69,1600 C10.2 3827.56,1600 Q3.3
  Bottom Layer w80: J3.2 3464.57,2264.17 3942.13,1786.61 3868.11,1712.6 3868.11,1466.54 3940.16,1394.49 Q4.2
NetC13_1: C13.1 D9.C U6.7 | length 382.7
  Top Layer w10: U6.7 2730.14,771.46 2745.69,755.91 C13.1 2919.31,755.91 D9.C
NetC13_2: C13.2 J3.3 Q5.3 Q6.2 U6.6 | length 5068.6
  Top Layer w10: U6.6 2718.72,721.46 2745.69,694.49 C13.2 3906.3,694.49 Q5.3
  Bottom Layer w80: J3.3 3264.57,1489.76 3951.97,802.36 3868.11,718.5 3868.11,482.28 3940.16,410.24 Q6.2
NetC19_1: C19.1 FL1.1 U8.2 | length 156.5
  Top Layer w10: U8.2 1301.58,308.67 C19.1 FL1.1
NetC20_1: C20.1 C21.2 FL1.2 U9.15 | length 252.7
  Top Layer w10: U9.15 1337.17,625.04 1337.17,595.37 1360.92,571.62 1360.92,549.93 1369.29,541.56 C20.1 FL1.2
NetD1_A: D1.A Q1.1 R3.2 | length 707.2
  Top Layer w10: R3.2 3582.3,2812.99 3499.43,2895.87 D1.A 4012.6,2969.29 Q1.1
NetD1_C: D1.C R2.2 | length 191.8
  Top Layer w10: R2.2 3250.02,2812.99 3332.89,2895.87 D1.C
NetD3_C: D3.C L1.1 U2.2 | length 876.9
  Top Layer w20: L1.1 1594.49,3484.09 D3.C 1597.02,3054.55 1597.02,2999.43 1633.86,2962.6 1863.91,2962.6 1875.62,2974.31 1875.62,3050.82 U2.2
NetD4_A: D4.A Q2.1 R6.2 | length 715.4
  Top Layer w10: R6.2 3582.3,2301.18 3499.43,2384.06 D4.A 3992.91,2457.48 Q2.1
NetD4_C: D4.C R5.2 | length 191.8
  Top Layer w10: R5.2 3250.02,2301.18 3332.89,2384.06 D4.C
NetD5_A: D5.A Q3.1 R13.2 | length 707.2
  Top Layer w10: R13.2 3582.3,1828.74 3499.43,1911.61 D5.A 4012.6,1985.04 Q3.1
NetD5_C: D5.C R11.2 | length 191.8
  Top Layer w10: R11.2 3250.02,1828.74 3332.89,1911.61 D5.C
NetD7_A: D7.A Q4.1 R18.2 | length 687.5
  Top Layer w10: R18.2 3582.3,1356.3 3499.43,1439.17 D7.A 4012.6,1492.91 Q4.1
NetD7_C: D7.C R17.2 | length 172.1
  Top Layer w10: R17.2 3250.02,1356.3 3332.89,1439.17 D7.C
NetD8_A: D8.A Q5.1 R26.2 | length 667.8
  Top Layer w10: R26.2 3582.3,883.86 3504.04,962.12 3504.04,996.17 D8.A 4012.6,1000.79 Q5.1
NetD8_C: D8.C R25.2 | length 152.4
  Top Layer w10: R25.2 3250.02,883.86 3328.28,962.12 3328.28,996.17 D8.C
NetD10_A: D10.A Q6.1 R28.2 | length 687.5
  Top Layer w10: R28.2 3582.3,372.05 3499.43,454.92 D10.A 4012.6,508.66 Q6.1
NetD10_C: D10.C R27.2 | length 172.1
  Top Layer w10: R27.2 3250.02,372.05 3332.89,454.92 D10.C
NetJ7_02: J7.02 U9.28 | length 505.3
  Top Layer w10: J7.02 1268.5,1033.07 U9.28
NetJ7_03: J7.03 U9.29 | length 548.3
  Top Layer w10: J7.03 1019.2,1182.38 1044.14,1182.38 1231.34,995.18 1231.34,965.51 U9.29
NetJ7_04: J7.04 U9.30 | length 623
  Top Layer w10: J7.04 939.2,1162.38 1032.65,1162.38 1199.84,995.18 1199.84,965.51 U9.30 ; U9.30@1205.51,985.55 1206.81,984.25 U9.30@1211.18,984.25
NetJ8_01: J8.01 U9.13 | length 945.9
  Top Layer w10: J8.01 1077.95,329.92 1262.83,514.8 1262.83,605 1268.5,610.67 U9.13
NetJ8_02: J8.02 U9.12 | length 851
  Top Layer w10: J8.02 1109.06,429.92 1231.34,552.2 1231.34,625.04 U9.12
NetJ8_03: J8.03 U9.10 | length 721.3
  Top Layer w10: J8.03 548.74,566.85 1139.82,566.85 1168.35,595.37 1168.35,625.04 U9.10
NetJ8_04: J8.04 U9.8 | length 599.2
  Top Layer w10: J8.04 1013.19,629.92 1068.31,685.04 U9.8
NetJ8_05: J8.05 U9.3 | length 623
  Top Layer w10: J8.05 521.53,729.92 539.64,748.03 866.14,748.03 960.63,842.52 U9.3
NetJ9_01: J9.01 R35.2 U9.31 | length 528.1
  Top Layer w10: R35.2 778.74,1179.92 790.87,1167.8 800.71,1167.8 826.91,1141.59 866.28,1141.59 905.51,1102.36 J9.01 1100.53,1062.99 1168.35,995.18 1168.35,965.51 U9.31
NetJ10_02: J10.02 U9.24 | length 403.3
  Top Layer w10: U9.24 1574.8,905.51 1692.91,787.4 J10.02
NetJ10_03: J10.03 U9.23 | length 431.6
  Top Layer w10: U9.23 1547.24,874.02 1733.86,687.4 J10.03
NetJ11_02: J11.02 U9.27 | length 395.4
  Top Layer w10: U9.27 1300,1138.89 1340.16,1179.04 J11.02
NetJ11_03: J11.03 U9.9 | length 846.2
  Top Layer w10: U9.9 1148.19,636.38 1148.19,675.75 v2(1181.1,708.66) ; J11.03@1427.95,1338.58 J11.03@1438.58,1327.95
  Bottom Layer w10: v2(1181.1,708.66) 1437.01,964.57 1437.01,1335.43 J11.03
NetJ12_02: J12.02 U9.26 | length 583.6
  Top Layer w10: U9.26 1331.6,959.94 1331.6,1005.55 1567.78,1241.73 J12.02
NetJ12_03: J12.03 U9.25 | length 512.6
  Top Layer w10: U9.25 1362.99,1008.66 1496.06,1141.73 J12.03
NetQ2_3: Q2.3 R7.2 R9.2 | length 2599
  Top Layer w10: v2(4990.16,403.54) 5016.14,429.53 R9.2
  Top Layer w80: Q2.3 4138.58,2278.74 4291.34,2125.98 4291.34,1614.17 5098.43,807.09 R9.2
  Bottom Layer w10: v2(4990.16,403.54) 5097.24,403.54 R7.2
NetQ4_3: Q4.3 R20.2 R22.2 | length 1457.8
  Top Layer w10: v2(4645.67,413.39) 4668.5,436.22 R22.2
  Top Layer w80: Q4.3 4106.71,1294.49 4763.78,637.42 4763.78,438.82 4761.18,436.22 R22.2
  Bottom Layer w10: v2(4645.67,413.39) 4752.76,413.39 R20.2
NetQ6_3: Q6.3 R29.2 R31.2 | length 679.7
  Top Layer w10: R31.2@4413.46,436.22 R31.2 4452.78,423.23 v2(4537.4,423.23)
  Top Layer w80: Q6.3 4027.85,323.92 4182.19,323.92 4294.49,436.22 R31.2@4413.46,436.22
  Bottom Layer w10: R29.2 4440.16,423.23 v2(4537.4,423.23)
NetR2_1: R2.1 R3.1 U1.8 | length 1124.9
  Top Layer w10: U1.8 2642.54,2707.48 2745.69,2810.63 3188.6,2810.63 3220.73,2778.5 3611.59,2778.5 3643.72,2810.63 R3.1
NetR5_1: R5.1 R6.1 U1.1 | length 1107.1
  Top Layer w10: U1.1 2617.89,2357.48 2675.37,2300 R5.1 3188.6,2298.82 3220.73,2266.69 3611.59,2266.69 3643.72,2298.82 R6.1
NetR7_1: R7.1 R8.2 U4.5 | length 702.4
  Bottom Layer w10: U4.5 5177.95,776.77 5216.22,738.5 5216.22,459.92 5099.61,343.31 R7.1 R8.2
NetR9_1: R9.1 R10.1 R14.1 R16.1 R22.1 R31.1 R32.2 R34.2 | length 2212.2
  Top Layer w10: v2(5451.95,318.11) 5451.95,220.89 R34.2
  Top Layer w80: R31.1 R22.1@4715.37,226.77 ; R22.1 5030.33,226.77 ; R9.1@5099.23,226.77 5374.82,226.77
  Bottom Layer w10: R14.1 R14.1@4920.08,530.31 ; R10.1 R16.1 R14.1@4920.08,530.31 ; R32.2@5451.2,205.89 5439.45,217.64 5439.45,223.59 5419.45,243.59 5419.45,290.27 5428.24,299.06 5438.28,299.06 5448.5,309.28 5448.5,314.67 v2(5451.95,318.11) ; R32.2 5452.76,177.17 5383.86,108.27 5078.74,108.27 4911.42,275.59 4911.42,521.65 R14.1@4920.08,530.31
NetR10_2: R10.2 R12.1 U4.6 | length 298
  Bottom Layer w10: U4.6 5073.09,726.77 5085.69,739.37 R12.1 5136.9,730.42 5155.4,730.42 5177.17,708.66 5177.17,629.92 5151.1,603.86 5140.08,603.86 R10.2
NetR11_1: R11.1 R13.1 U5.8 | length 1136.8
  Top Layer w10: U5.8 2606.04,1726.97 2706.63,1827.56 R11.1 3188.6,1826.38 3220.73,1794.25 3611.59,1794.25 3643.72,1826.38 R13.1
NetR12_2: R12.2 U4.7 U9.6 | length 5687.6
  Top Layer w10: v2(974.41,728.35) 977.85,731.79 984.74,731.79 1000.98,748.03 U9.6
  Bottom Layer w10: v2(974.41,728.35) 954.72,708.66 954.72,344.49 1240.47,58.74 4182.76,58.74 4281.81,157.8 4281.81,581.02 4708.5,1007.72 4857.9,1007.72 4940.94,924.67 4940.94,748.03 5012.2,676.77 U4.7 5126.77,676.77 R12.2
NetR14_2: R14.2 R15.1 U4.9 | length 282.4
  Bottom Layer w10: R15.1 4778.01,739.37 4790.61,726.77 4851.65,726.77 4901.26,677.17 4901.26,645.59 4911.42,635.43 R14.2
NetR15_2: R15.2 U4.8 U9.5 | length 5435.5
  Top Layer w10: v2(935.04,748.03) 938.48,751.48 938.48,766.38 951.63,779.53 U9.5
  Bottom Layer w10: v2(935.04,748.03) 930.17,748.03 885.83,703.69 885.83,295.28 1162.36,18.74 4743.15,18.74 4862.2,137.8 4862.2,637.4 U4.8 4735.43,676.77 R15.2
NetR16_2: R16.2 R19.1 U4.13 | length 515
  Bottom Layer w10: R19.1 4781.86,914.17 4794.46,926.77 U4.13 4851.65,926.77 4920.94,857.48 4920.94,739.75 4921.26,739.43 4921.26,660.63 R16.2
NetR17_1: R17.1 R18.1 U5.1 | length 1134.2
  Top Layer w10: U5.1 2606.04,1376.97 2664.11,1318.9 3152.38,1318.9 R17.1 3188.6,1353.94 3220.73,1321.81 3611.59,1321.81 3643.72,1353.94 R18.1
NetR19_2: R19.2 U4.14 U9.11 | length 5197.3
  Top Layer w10: v2(915.35,482.28) 954.72,521.65 1151.57,521.65 1199.84,569.92 1199.84,625.04 U9.11
  Bottom Layer w10: v2(915.35,482.28) 915.35,324.8 1201.42,38.74 4191.04,38.74 4301.81,149.51 4301.81,561.65 4706.8,966.65 4725.31,966.65 R19.2 4735.43,976.77 U4.14
NetR20_1: R20.1 R21.2 U4.10 | length 747.7
  Bottom Layer w10: R21.2 R20.1 4664.89,353.15 4616.67,401.37 4616.67,678.43 4715.01,776.77 U4.10
NetR23_2: R23.2 R24.1 U4.2 | length 540.7
  Bottom Layer w10: U4.2 5073.09,926.77 5085.69,914.17 R24.1 5217.72,914.17 5305.12,826.77 R23.2@5305.12,591.73
NetR24_2: R24.2 U4.1 U9.7 | length 5349.8
  Top Layer w10: v2(994.09,679.13) 1031.5,716.54 U9.7
  Bottom Layer w10: v2(994.09,679.13) 994.09,364.17 1279.53,78.74 4173.23,78.74 4261.81,167.32 4261.81,600.39 4694.88,1033.46 4955.35,1033.46 5012.05,976.77 U4.1 5126.77,976.77 R24.2
NetR25_1: R25.1 R26.1 U6.8 | length 1118.8
  Top Layer w10: U6.8 2606.04,821.46 2666.08,881.5 3188.6,881.5 3220.73,849.37 3611.59,849.37 3643.72,881.5 R26.1
NetR27_1: R27.1 R28.1 U6.1 | length 1136.8
  Top Layer w10: U6.1 2606.04,471.46 2706.63,370.87 R27.1 3188.6,369.69 3220.73,337.56 3611.59,337.56 3643.72,369.69 R28.1
NetR29_1: R29.1 R30.2 U4.12 | length 865.2
  Bottom Layer w10: R30.2 R29.1 4437.8,362.99 4405.67,395.12 4405.67,626.14 4656.3,876.77 U4.12
NetR32_1: R32.1 R33.2 U4.3 | length 984
  Bottom Layer w10: U4.3 5043.28,874.36 5218.16,874.36 5275.59,816.93 5275.59,433.07 5335.83,372.83 R33.2 5492.13,333.46 5492.13,306.3 R32.1
NetR36_1: R36.1 S1.1 S1.2 U9.4 | length 1201.2
  Top Layer w10: S1.2 S1.1 540.61,927.17 580.85,886.93 775.28,886.93 R36.1 v2(787.4,826.77) ; v2(984.25,808.53) 984.78,809.06 1086.22,809.06 U9.4
  Bottom Layer w10: v2(787.4,826.77) 807.09,807.09 982.81,807.09 v2(984.25,808.53)
NetU1_12: U1.12 U9.18 | length 2280.9
  Top Layer w10: U9.18 1418.31,717.52 1495.08,717.52 v2(1496.06,718.5) ; v2(2125.98,2559.06) 2126.77,2558.27 2218.6,2558.27 U1.12
  Bottom Layer w10: v2(1496.06,718.5) 1499.51,721.95 1509.35,721.95 1711.86,924.46 1711.86,2144.93 v2(2125.98,2559.06)
NetU1_14: U1.14 U9.21 | length 2216.4
  Top Layer w10: U9.21 1420.73,807.61 1544.75,807.61 v2(1545.28,807.09) ; v2(1958.66,2460.63) 1961.81,2457.48 U1.14
  Bottom Layer w10: v2(1545.28,807.09) 1683.07,944.88 1683.07,2185.04 v2(1958.66,2460.63)
NetU5_12: U5.12 U9.19 | length 1571.2
  Top Layer w10: v2(1348.43,757.87) 1353.3,757.87 1363.14,748.03 U9.19 ; v2(1633.86,1555.12) 1654.63,1575.89 2206.46,1575.89 U5.12
  Bottom Layer w10: v2(1348.43,757.87) 1348.43,836.61 1604.33,1092.52 1604.33,1525.59 v2(1633.86,1555.12)
NetU5_14: U5.14 U9.22 | length 1340.4
  Top Layer w10: U9.22 1420.28,839.57 1512.8,839.57 v2(1515.75,836.61) ; v2(1653.54,1456.69) 1656.25,1456.69 1675.4,1475.85 1682.47,1475.85 1683.59,1476.97 U5.14
  Bottom Layer w10: v2(1515.75,836.61) 1633.86,954.72 1633.86,1432.14 1653.54,1451.82 v2(1653.54,1456.69)
NetU6_12: U6.12 U9.20 | length 1031.6
  Top Layer w10: U9.20 1494.09,779.53 1555.12,718.5 1555.12,580.71 1604.33,531.5 1958.66,531.5 2097.54,670.37 2206.46,670.37 U6.12
NetU6_14: U6.14 U9.2 | length 1324.3
  Top Layer w10: U9.2 1133.86,874.02 1295.77,712.11 1295.77,702.26 v2(1299.21,698.82) ; v2(2096.46,570.87) 2096.75,571.16 2207.24,571.16 U6.14
  Bottom Layer w10: v2(1299.21,698.82) 1387.8,610.24 1456.69,610.24 1584.65,482.28 2007.87,482.28 v2(2096.46,570.87)
VCC: C6.1 C12.1 C15.1 J2.01 J5.2 Q1.2 Q3.2 Q5.2 | length 7383.4
  Top Layer w20: J2.01 3710.63,3198.82 3838.58,3326.77 3838.58,3543.31 3947.64,3652.36 4038.6,3652.36 J5.2
  Bottom Layer w80: Q5.2 4183.88,902.36 4321.67,1040.16 4321.67,1102.36 ; Q3.2 4183.88,1886.61 ; Q1.2 4144.51,2870.87 ; J5.2 4182.3,3659.84 4321.67,3520.47 4321.67,3048.03 4144.51,2870.87 ; C12.1 4832.68,1535.43 4399.61,1102.36 4321.67,1102.36 ; C15.1 4321.67,2244.09 ; C6.1 4731.1,2693.7 4321.67,2693.7 ; 4144.51,2870.87 4321.67,2693.7 ; 4183.88,1886.61 4321.67,2024.41 4321.67,2244.09 ; 4183.88,1886.61 4321.67,1748.82 4321.67,1102.36 ; 4321.67,2244.09 4321.67,2693.7
pads on no net: U1.4 U1.5 U1.9 U1.10 U1.16 U5.4 U5.5 U5.9 U5.10 U5.16 U6.4 U6.5 U6.9 U6.10 U6.16

## Polygon pours and split planes (outlines as drawn)
GND on Bottom Layer "GND_L02_P001" (solid, pour order 1): 161.42,3964.57 3.94,3807.09 0,3803.15 0,161.42 161.42,0 5476.38,0 5488.19,11.81 5629.92,153.54 5629.92,169.29 5629.92,3803.15 5468.5,3964.57
GND on Top Layer "GND_L01_P000" (solid, pour order 0): 0,161.42 161.42,0 5476.38,0 5629.92,153.54 5629.92,3803.15 5468.5,3964.57 161.42,3964.57 0,3803.15

## Silkscreen, mask and mechanical layers (free items; w line width, h text height)
Top Overlay:
  text "PWR_IN" at 3878.11,3789.68 h60
  text "MOTOR OUT" at 3218.66,3779.68 h60
  text "+12V" at 88.74,3622.2 h60
  text "OUT" at 374.17,3622.2 h60
  text "IN" at 2962.76,3346.61 h60
  text "+5V" at 403.7,1742.28 h60
  text "MISC" at 797.4,1427.32 h60
  text "ENCODER" at 1191.1,1427.32 h60
  text "GND   TX   RX  +5V" at 1673.23,1377.95 h20 r270
  text "USART" at 1860.39,1328.58 h60 r270
  text "PB7  PB6  PB5  GND" at 728.35,1240.16 h20
  text "GND   D1   D2  +5V" at 1200.79,1240.16 h20
  text "B0" at 817.09,1132.05 h60
  text "GND SWCLK SWDIO +5V" at 1673.23,935.04 h20 r270
  text "SWD" at 1860.39,816.77 h60 r270
  text "Analog In" at 620.54,777.4 h60 r270
  text "PF1  PA3  PA5  PA7  PB0" at 413.39,757.87 h20 r270
  text "RST" at 167.48,443.07 h60